# Altium PCB urbanturbine.PcbDoc
Units mil, origin at the board's own origin, x right, y up, seen from the top; angles counter-clockwise.
Board outline 2235 x 2080 mil, 2 copper layers (Top Layer, Bottom Layer); 33 components, 39 nets, 137 pads, 9 vias.
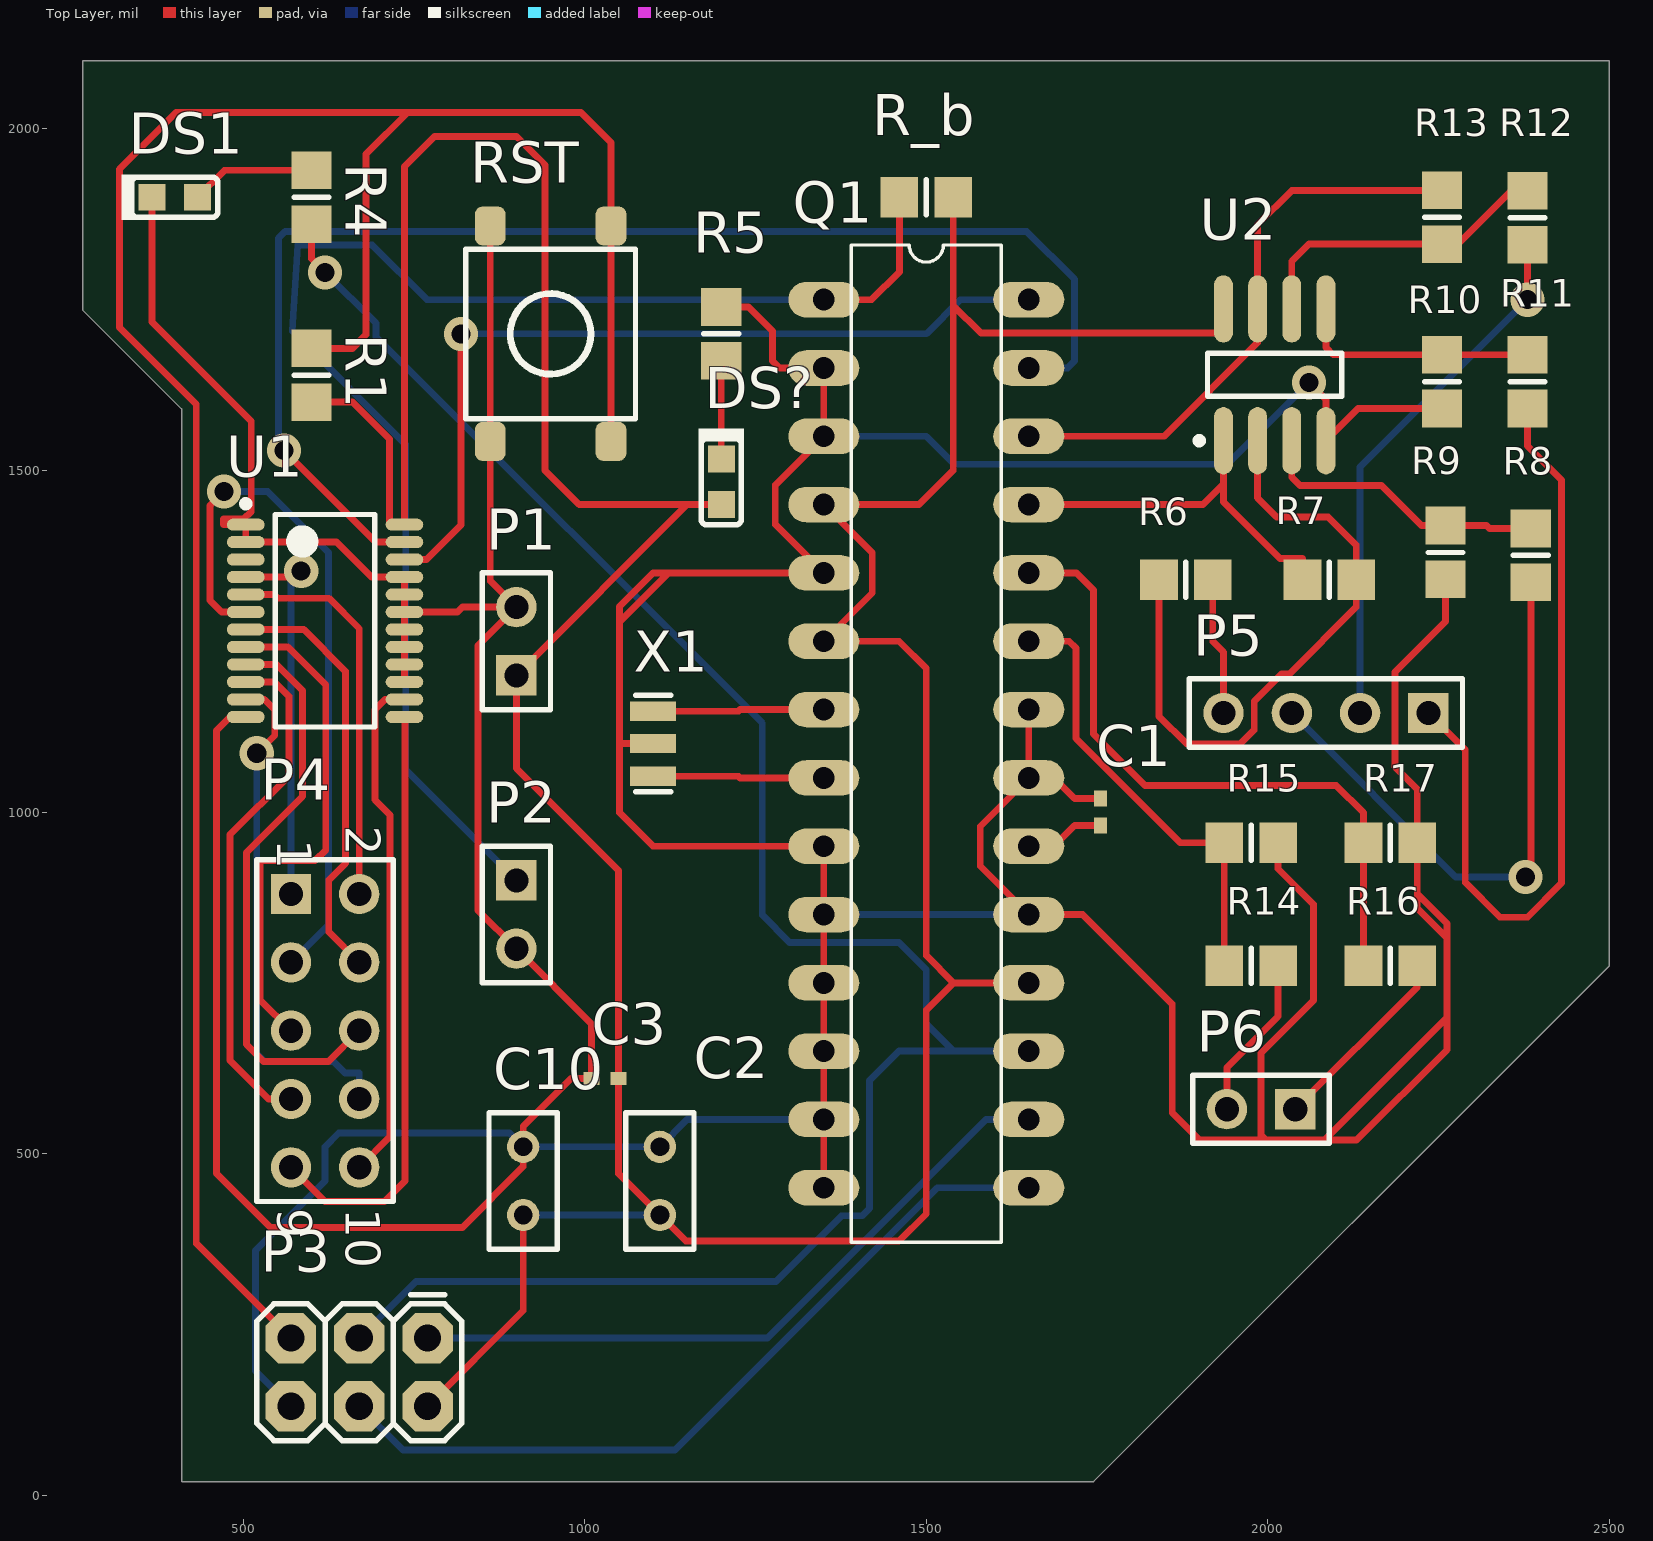
[diagram p0: Top Layer view]
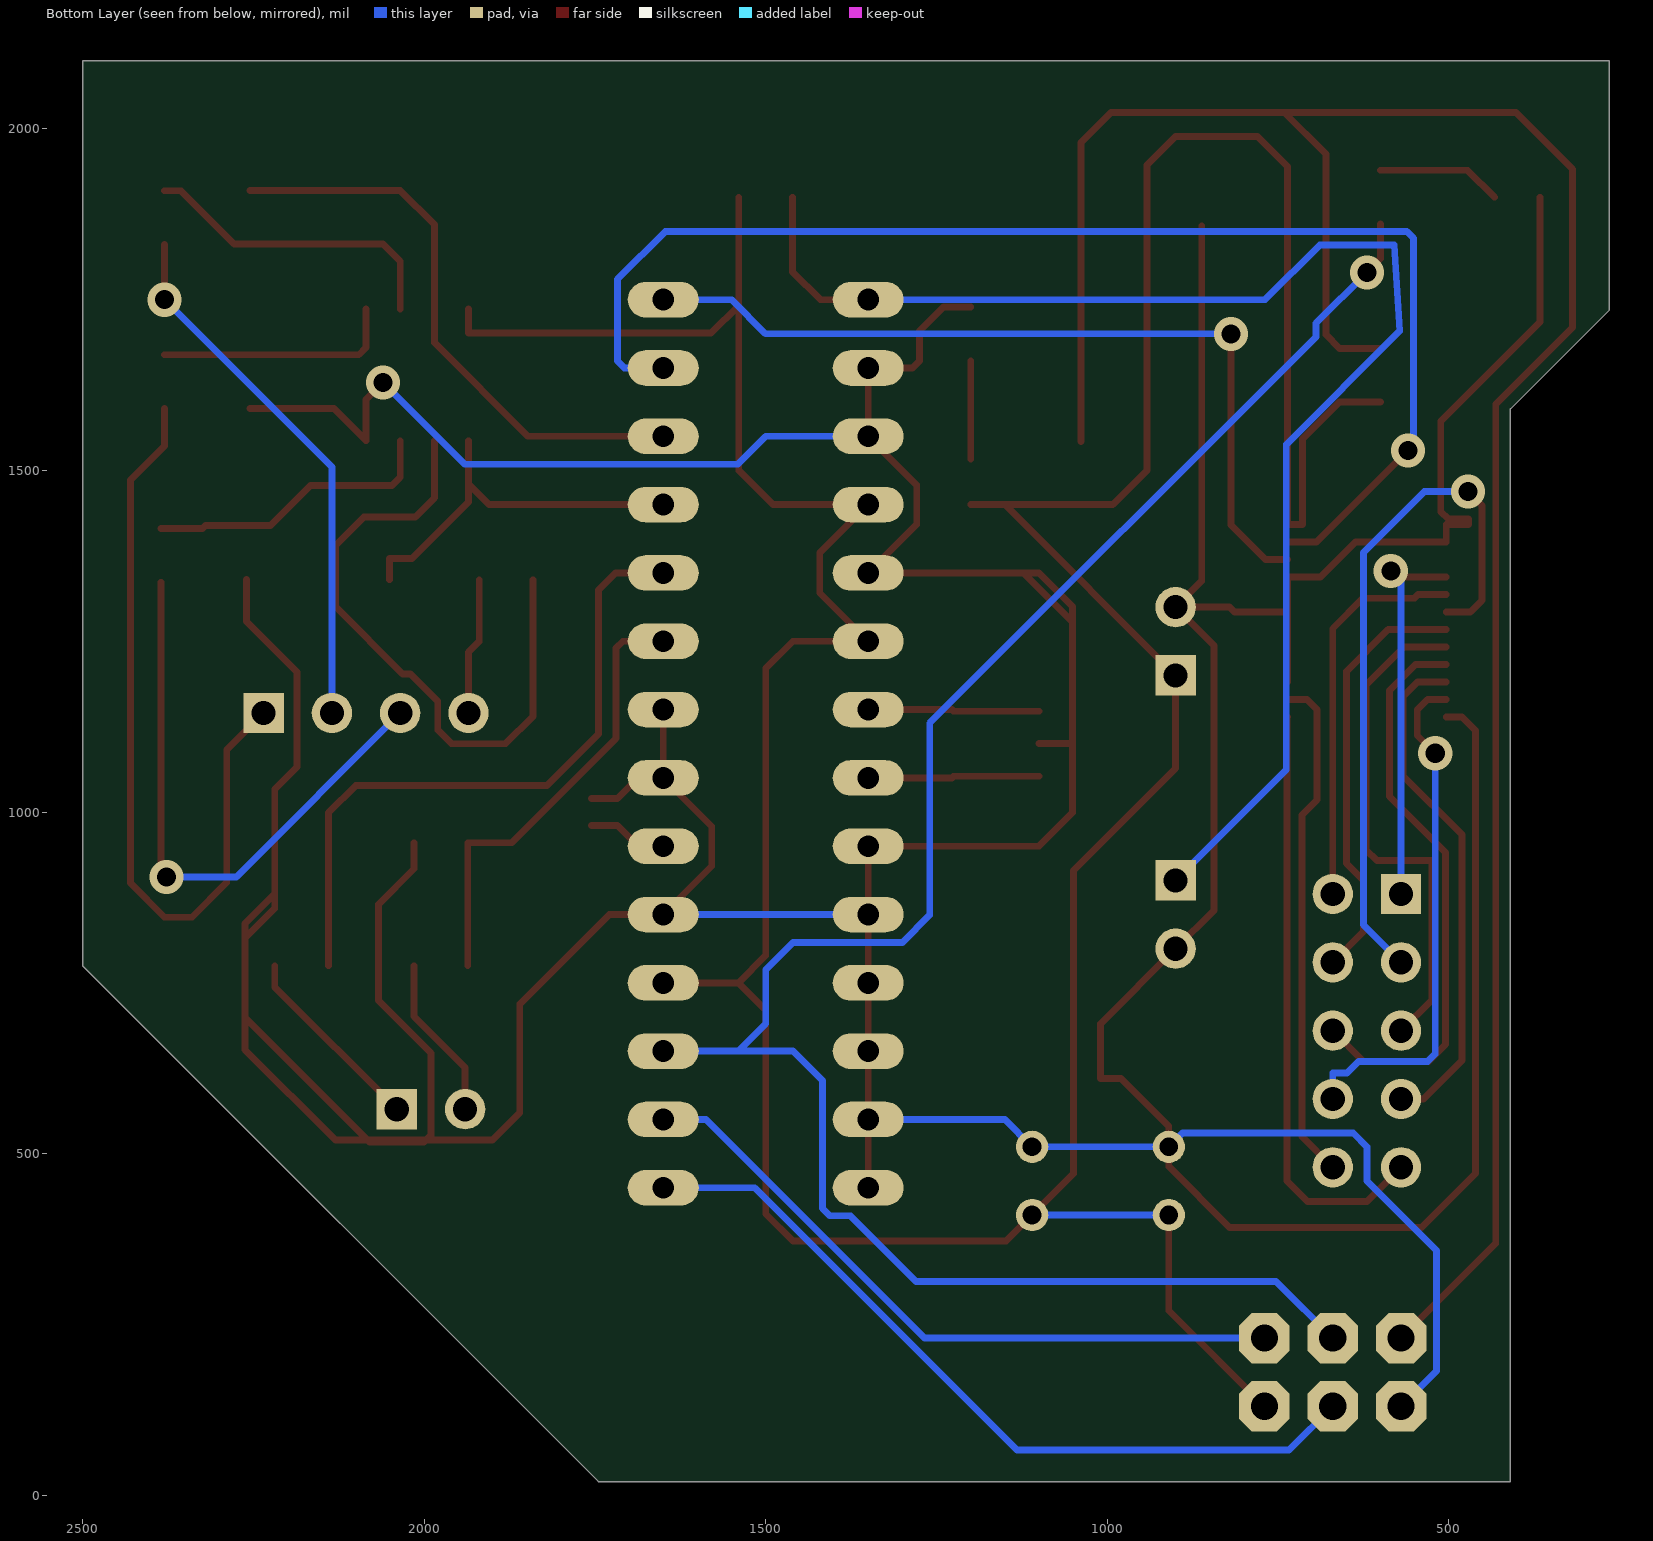
[diagram p1: Bottom Layer view, seen from below]

## Layer stack, top to bottom
Top Solder: solder mask 0.4, Solder Resist, Dk 3.5
Top Layer: signal copper 1.4
Dielectric 1: dielectric 12.6, FR-4, Dk 4.8
Bottom Layer: signal copper 1.4
Bottom Solder: solder mask 0.4, Solder Resist, Dk 3.5

## Board outline
410,1590 265,1735 265,2100 2500,2100 2500,775 1745,20 410,20

## Design rules (kind name [scope] priority, off if disabled: settings)
Clearance [All] p1: gap=10 ignorepadtopadclearanceinfootprint=FALSE except(0: Arc-Hole Track-Hole SMDPad-Hole THPad-Hole Via-Hole Fill-Hole Poly-Hole Region-Hole Text-Hole)
PolygonConnect [All] p1: connectstyle=Relief reliefconductorwidth=10 reliefentries=4 polygonreliefangle="90 Angle" airgapwidth=10
RoutingVias [All] p1: holewidth=28 width=50 viastyle="Through Hole" minholewidth=28 minwidth=50 maxholewidth=28 maxwidth=50
SolderMaskExpansion [All] p1: expansion=4
Width [All] p1: maxlimit=10 minlimit=10 preferedwidth=10
30 further rules are at their usual default settings.

## Classes and differential pairs
component class urbanturbine: C1 C2 C3 C10 DS1 DS? P1 P2 P3 P4 Q1 R1 R4 R5 R_b RST U1 X1
component class sensors: P5 P6 R6 R7 R8 R9 R10 R11 R12 R13 R14 R15 R16 R17 U2

## Components (designator, comment, footprint, x,y, rotation, side; value= is the part's Value field where it differs from the comment)
C1 "C1005X7R1H104K050BB" 0402 1755,1000 r270 top value=0.1uF
C2 "Cap Pol1" RAD-0.1 1110,460 r90 top value=100pF
C3 "C1005X7R1H104K050BB" 0402 1029.68,610 r0 top value=0.1uF
C10 "Cap Pol1" RAD-0.1 910,460 r90 top value=100pF
DS1 "LTST-C191KRKT" KING-LED0603-25-RED_V 400,1900 r0 top
DS? "LTST-C191KGKT" KING-LED0603-25-GREEN_V 1200,1483.46 r270 top
P1 "" HDR1X2 900,1200 r90 top
P2 "" HDR1X2 900,900 r270 top
P3 "M20-9980346" 2X3 770,230 r180 top
P4 "Header 5X2" HDR2X5 570,880 r270 top
P5 "" HDR1X4 2235,1145 r180 top
P6 "" HDR1X2 2040,565 r180 top
Q1 "ATMEGA328P-MU" *DIL28 1500,1100 r0 top
R1 "Res1" 6-0805_M 600,1639.37 r90 top value=1K
R4 "Res1" 6-0805_M 600,1900 r90 top value=1K
R5 "RC0603JR-071KL" 6-0805_M 1200,1700 r90 top value=1k
R6 "10k" 6-0805_M 1880,1340 r0 top value="100k Ohm"
R7 "100k" 6-0805_M 2090,1340 r0 top value="100k Ohm"
R8 "10k" 6-0805_M 2385,1375.63 r270 top value="100k Ohm"
R9 "100k" 6-0805_M 2260,1380 r270 top value="100k Ohm"
R10 "100k" 6-0805_M 2255,1630 r90 top value="100k Ohm"
R11 "10k" 6-0805_M 2380,1630 r270 top value="100k Ohm"
R12 "10k" 6-0805_M 2380,1870 r90 top value="100k Ohm"
R13 "100k" 6-0805_M 2255,1870.63 r90 top value="100k Ohm"
R14 "90k" 6-0805_M 1975.63,775 r0 top value="10k Ohm"
R15 "10k" 6-0805_M 1975.63,955 r180 top value="22k Ohm"
R16 "90k" 6-0805_M 2179.37,775 r0 top value="10k Ohm"
R17 "10k" 6-0805_M 2179.37,955 r180 top value="22k Ohm"
R_b "Res1" 6-0805_M 1500,1900 r180 top value=1K
RST "PTS645SH50SMTR92 LFS" "TACTILE SWITCH SMD" 950,1700 r90 top
U1 "TCA9548A" TCA9548A 620,1280 r0 top
U2 "NCS2333" SO8_M 2010,1640 r90 top
X1 "16MHz" RESONATOR-SMD 1100,1100 r270 top

## Footprints (in the part's own frame and the unit in brackets; to place one, negate y for a bottom-side part, rotate by r counter-clockwise, add the part's x,y. Pads: shape width x height; smd on the part's side, far side on the other; paste and mask are expansions set on the pad)
2X3 [mil] "2X3"
  oct 74x74 hole 40: 1(0,0) 2(0,100) 3(100,0) 4(100,100) 5(200,0) 6(200,100)
  silkscreen extent -50,-63 250,150, body extent -50,-49 250,149, height 335
6-0805_M [mm] "Chip Resistor, Body 2.0x1.2mm, IPC Low Density"
  rect 1.4x1.5 smd: 1(-1,0) 2(1,0)
  silkscreen extent 0,-0.65 0,0.65, body extent -1.07,-0.7 1.07,0.7, height 0.7
0402 [mm] "Chip Capacitor, Body 1.0x0.5mm, IPC High Density"
  rect 0.6x0.5 smd: 1(-0.5,0) 2(0.5,0)
  body extent -0.55,-0.3 0.55,0.3, height 1.3
*DIL28 [mil]
  oval 104x52 hole 32: 1(-150,650) 2(-150,550) 3(-150,450) 4(-150,350) 5(-150,250) 6(-150,150) 7(-150,50) 8(-150,-50) 9(-150,-150) 10(-150,-250) 11(-150,-350) 12(-150,-450) 13(-150,-550) 14(-150,-650) 15(150,-650) 16(150,-550) 17(150,-450) 18(150,-350) 19(150,-250) 20(150,-150) 21(150,-50) 22(150,50) 23(150,150) 24(150,250) 25(150,350) 26(150,450) 27(150,550) 28(150,650)
  silkscreen extent -110,-730 110,730, body extent -315,-730 110,730, height 314
HDR1X2 [mm] "Connector; Header; 2 Position"
  rect 1.5x1.5 hole 0.9: 1(0,0)
  round 1.5 hole 0.9: 2(2.54,0)
  silkscreen extent -1.27,-1.27 3.81,1.27
HDR1X4 [mm] "Connector; Header; 4 Position"
  rect 1.5x1.5 hole 0.9: 1(0,0)
  round 1.5 hole 0.9: 2(2.54,0) 3(5.08,0) 4(7.62,0)
  silkscreen extent -1.27,-1.27 8.89,1.27
HDR2X5 [mm] "Connector; Header; 5x2 Position"
  rect 1.5x1.5 hole 0.9: 1(0,0)
  round 1.5 hole 0.9: 2(0,2.54) 3(2.54,0) 4(2.54,2.54) 5(5.08,0) 6(5.08,2.54) 7(7.62,0) 8(7.62,2.54) 9(10.16,0) 10(10.16,2.54)
  silkscreen extent -1.27,-1.27 11.43,3.81
KING-LED0603-25-GREEN_V [mm] "LED, SMT, Body 1.6 x 0.8 mm, 0.25mm Thickness"
  rect 1x1 smd paste+0 mask+0: 1(0.85,0) 2(-0.85,0)
  silkscreen extent -1.97,-0.85 1.6,0.85, body extent -0.8,-0.4 0.8,0.4, height 0.25
KING-LED0603-25-RED_V [mm] "LED, SMT, Body 1.6 x 0.8 mm, 0.25mm Thickness"
  rect 1x1 smd paste+0 mask+0: 1(0.85,0) 2(-0.85,0)
  silkscreen extent -1.97,-0.85 1.6,0.85, body extent -0.8,-0.4 0.8,0.4, height 0.25
RAD-0.1 [mm] "Radial Cap, Thru-Hole; 2 Leads; 0.1 in Pin Spacing"
  round 1.2 hole 0.7: 1(-1.27,0) 2(1.27,0)
  silkscreen extent -2.54,-1.27 2.54,1.27
RESONATOR-SMD [mil] "RESONATOR-SMD"
  rect 28x67 smd: 1(-47.62,0) 2(-0.38,0) 3(47.62,0)
  silkscreen extent -71,-26 71,26
SO8_M [mm] "SOIC, 8-Leads, Body 4.9x3.9mm, Pitch 1.27mm, IPC Low Density"
  oval 2.5x0.7 smd: 1(-2.45,1.905) 2(-2.45,0.635) 3(-2.45,-0.635) 4(-2.45,-1.905) 5(2.45,-1.905) 6(2.45,-0.635) 7(2.45,0.635) 8(2.45,1.905)
  silkscreen extent -2.57,-2.5 0.8,2.93, body extent -2,-2.5 2,2.5, height 1.75
"TACTILE SWITCH SMD" [mil] "Switch, Through-Hole, 4 Leads, Body 8.5x8.5mm, Row Spacing 9.0mm, Pitch 4.5mm"
  rrect50% 57x45 smd: 1(157.87,-88.58) 2(-157.48,-88.58) 3(157.87,88.19) 4(-157.48,88.19)
  silkscreen extent -124,-124 124,124, body extent -177,-122 177,122, height 177
TCA9548A [mm] "TSOP, 24-Leads, Body 7.80x4.40mm, Pitch 0.65mm, IPC Medium Density"
  oval 1.4x0.45 smd: 1(-2.95,3.575) 2(-2.95,2.925) 3(-2.95,2.275) 4(-2.95,1.625) 5(-2.95,0.975) 6(-2.95,0.325) 7(-2.95,-0.325) 8(-2.95,-0.975) 9(-2.95,-1.625) 10(-2.95,-2.275) 11(-2.95,-2.925) 12(-2.95,-3.575) 13(2.95,-3.575) 14(2.95,-2.925) 15(2.95,-2.275) 16(2.95,-1.625) 17(2.95,-0.975) 18(2.95,-0.325) 19(2.95,0.325) 20(2.95,0.975) 21(2.95,1.625) 22(2.95,2.275) 23(2.95,2.925) 24(2.95,3.575)
  silkscreen extent -3.07,-3.95 1.85,4.47, body extent -3.27,-3.96 3.28,3.93, height 1.2

## Part data
C1 C3: "CAP CER 0.1UF 50V 10% X7R 0402", Capacitance=0.1µF, Manufacturer="TDK Corporation", Operating Temperature="-55°C ~ 125°C", Package / Case="0402 (1005 Metric)", Ratings=-, Supplier Part Number 1=445-5932-1-ND, Temperature Coefficient=X7R, Tolerance=±10%, Voltage - Rated=50V, Applications="General Purpose", Category=Capacitors, ComponentLink1Description=http://product.tdk.com/en/catalog/datasheets/mlcc_commercial_general_en.pdf, ComponentLink1URL=http://product.tdk.com/en/catalog/datasheets/mlcc_commercial_general_en.pdf, Features=-, Height - Seated (Max)=-, Lead Spacing=-, Lead Style=-, Manufacturer Part Number=C1005X7R1H104K050BB, Mounting Type="Surface Mount, MLCC", Packaging="Cut Tape (CT)", Pricing 1="1=0.21, 10=0.14, 100=0.0664, 250=0.05592, 500=0.04684, 1000=0.03845, 5000=0.03251 (CAD)", RoHS="RoHS Compliant", Size / Dimension="0.039\" L x 0.020\" W (1.00mm x 0.50mm)", Stock 1=7100869, Supplier 1=Digi-Key, Thickness (Max)="0.022\" (0.55mm)"
C2 C10: "Polarized Capacitor (Radial)", LatestRevisionDate=17-Jul-2002, LatestRevisionNote="Re-released for DXP Platform.", PackageDescription="Polarized Capacitor (Radial); 2 Leads", PackageReference=RB7.6-15, Published=8-Jun-2000, Publisher="Altium Limited"
DS1: "LED SUPER RED CLR THIN 0603 SMD", Color=Red, Current - Test=20mA, Lens Color=Colorless, Manufacturer="Lite-On Inc.", Millicandela Rating=54mcd, Package / Case="0603 (1608 Metric)", Supplier Part Number 1=160-1447-1-ND, Voltage - Forward (Vf) (Typ)=2V, Category=Optoelectronics, ComponentLink1Description=http://optoelectronics.liteon.com/upload/download/DS22-2000-223/S_110_LTST-C191KRKT.pdf, ComponentLink1URL=http://optoelectronics.liteon.com/upload/download/DS22-2000-223/S_110_LTST-C191KRKT.pdf, Height (Max)=0.55mm, Lens Style/Size="Rectangle with Flat Top, 1.10mm x 0.80mm", Lens Transparency=Clear, Manufacturer Part Number=LTST-C191KRKT, Mounting Type="Surface Mount", Packaging="Cut Tape (CT)", Pricing 1="1=0.42, 10=0.333, 100=0.1812, 250=0.1208, 500=0.10268, 1000=0.07853, 2500=0.07098 (CAD)", RoHS="RoHS Compliant", Size / Dimension="1.60mm L x 0.80mm W", Stock 1=239192, Supplier 1=Digi-Key, Viewing Angle=130°, Wavelength - Dominant=631nm, Wavelength - Peak=639nm
DS?: "LED GREEN CLEAR THIN 0603 SMD", Color=Green, Current - Test=20mA, Lens Color=Colorless, Manufacturer="Lite-On Inc.", Millicandela Rating=35mcd, Package / Case="0603 (1608 Metric)", Supplier Part Number 1=160-1446-6-ND, Voltage - Forward (Vf) (Typ)=2V, Category=Optoelectronics, ComponentLink1Description=http://optoelectronics.liteon.com/upload/download/DS22-2000-228/S_110_LTST-C191KGKT.pdf, ComponentLink1URL=http://optoelectronics.liteon.com/upload/download/DS22-2000-228/S_110_LTST-C191KGKT.pdf, Height (Max)=0.55mm, Lens Style/Size="Rectangle with Flat Top, 1.10mm x 0.80mm", Lens Transparency=Clear, Manufacturer Part Number=LTST-C191KGKT, Mounting Type="Surface Mount", Packaging=Digi-Reel®, Pricing 1="1=0.42, 10=0.333, 100=0.1812, 250=0.1208, 500=0.10268, 1000=0.07853, 2500=0.07098 (CAD)", RoHS="RoHS Compliant", Size / Dimension="1.60mm L x 0.80mm W", Stock 1=186242, Supplier 1=Digi-Key, Viewing Angle=130°, Wavelength - Dominant=571nm, Wavelength - Peak=574nm
P1 P2 P6: library part "Header 2", "Header, 2-Pin", LatestRevisionDate=17-Jul-2002, LatestRevisionNote="Re-released for DXP Platform.", Publisher="Altium Limited"
P3: "DIL VERTICAL PC TAIL PIN HEADER", Color=Black, Manufacturer="Harwin Inc.", Supplier Part Number 1=952-2121-ND, Category="Connectors, Interconnects", ComponentLink1Description=http://cdn.harwin.com/pdfs/M20-998.pdf, ComponentLink1URL=http://cdn.harwin.com/pdfs/M20-998.pdf, Connector Type="Header, Unshrouded, Breakaway", Contact Finish=Tin, Contact Finish Thickness=-, Contact Mating Length="0.240\" (6.10mm)", Contact Type="Male Pin", Fastening Type=-, Features=-, Manufacturer Part Number=M20-9980346, Mounting Type="Through Hole", Number of Positions=6, Number of Positions Loaded=All, Number of Rows=2, Packaging=Bulk, Pitch="0.100\" (2.54mm)", Pricing 1="1=0.32, 10=0.299, 25=0.2552, 50=0.2232, 100=0.2072, 250=0.18336, 500=0.17534, 1000=0.14346, 2500=0.13151 (CAD)", RoHS="RoHS Compliant", Row Spacing="0.100\" (2.54mm)", Stock 1=14297, Supplier 1=Digi-Key, Termination=Solder
P4: "Header, 5-Pin, Dual row", LatestRevisionDate=17-Jul-2002, LatestRevisionNote="Re-released for DXP Platform.", Publisher="Altium Limited"
P5: library part "Header 4", "Header, 4-Pin", LatestRevisionDate=17-Jul-2002, LatestRevisionNote="Re-released for DXP Platform.", Publisher="Altium Limited"
Q1: "IC MCU 8BIT 32KB FLASH 32QFN", Manufacturer=Atmel, Operating Temperature="-40°C ~ 85°C", Package / Case="32-VFQFN Exposed Pad", Supplier Device Package="32-VQFN (5x5)", Supplier Part Number 1=ATMEGA328P-MU-ND, Voltage - Supply (Vcc/Vdd)="1.8 V ~ 5.5 V", Category="Integrated Circuits (ICs)", ComponentLink1Description=http://www.atmel.com/images/atmel-8271-8-bit-avr-microcontroller-atmega48a-48pa-88a-88pa-168a-168pa-328-328p_datasheet_summary.pdf, ComponentLink1URL=http://www.atmel.com/images/atmel-8271-8-bit-avr-microcontroller-atmega48a-48pa-88a-88pa-168a-168pa-328-328p_datasheet_summary.pdf, Connectivity="I²C, SPI, UART/USART", Core Processor=AVR, Core Size=8-Bit, Data Converters="A/D 8x10b", EEPROM Size="1K x 8", Manufacturer Part Number=ATMEGA328P-MU, Number of I/O=23, Oscillator Type=Internal, Packaging=Tray, Peripherals="Brown-out Detect/Reset, POR, PWM, WDT", Pricing 1="1=5.01, 10=4.465, 100=3.6608, 250=3.30364, 500=2.96432, 1000=2.50003 (CAD)", Program Memory Size="32KB (16K x 16)", Program Memory Type=FLASH, RAM Size="2K x 8", RoHS="RoHS Compliant", Speed=20MHz, Stock 1=70195, Supplier 1=Digi-Key
R1 R4 R_b: "Resistor", LatestRevisionDate=17-Jul-2002, LatestRevisionNote="Re-released for DXP Platform.", PackageDescription="Axial Device, Thru-Hole; 2 Leads; 0.3 in Pin Spacing", PackageReference=AXIAL-0.3, Published=8-Jun-2000, Publisher="Altium Limited"
R5: "RES SMD 1K OHM 5% 1/10W 0603", Manufacturer=Yageo, Operating Temperature="-55°C ~ 155°C", Package / Case="0603 (1608 Metric)", Power (Watts)="0.1W, 1/10W", Resistance (Ohms)=1k, Supplier Device Package=0603, Supplier Part Number 1=311-1.0KGRCT-ND, Temperature Coefficient=±100ppm/°C, Tolerance=±5%, Category=Resistors, ComponentLink1Description=http://www.yageo.com/NewPortal/yageodocoutput?fileName=/pdf/R-Chip/PYu-RC_Group_51_RoHS_L_3.pdf, ComponentLink1URL=http://www.yageo.com/NewPortal/yageodocoutput?fileName=/pdf/R-Chip/PYu-RC_Group_51_RoHS_L_3.pdf, Composition="Thick Film", Features="Moisture Resistant", Height="0.022\" (0.55mm)", Manufacturer Part Number=RC0603JR-071KL, Number of Terminations=2, Packaging="Cut Tape (CT)", Pricing 1="1=0.15, 10=0.016, 25=0.012, 100=0.0066, 250=0.005, 500=0.00402, 1000=0.00295, 2500=0.00256 (CAD)", RoHS="RoHS Compliant", Size / Dimension="0.063\" L x 0.031\" W (1.60mm x 0.80mm)", Stock 1=1746734, Supplier 1=Digi-Key
R6 R7 R8 R9 R10 R11 R12 R13: library part 100k-125mW-0805-1%, "Resistor, 100k, 125mW Power Rating, 0805 Package", ManufacturerReference=MCR10EZPF1003, PowerRating=125mWatt, Category=Resistor, DistributorName=Digikey, DistributorReference=RHM100KCRCT-ND, InventoryNumber=RES052, Other=1%, PackageReference=0805
R14 R16: library part 10k-125mW-0805-1%, "Resistor, 10k, 125mW Power Rating, 0805 Package", ManufacturerReference=MCR10EZPF1002, PowerRating=125mWatt, Category=Resistor, DistributorName=Digikey, DistributorReference=RHM10.0KCRCT-ND, InventoryNumber=RES038, Other=1%, PackageReference=0805
R15 R17: library part 22k-125mW-0805-1%, "Resistor, 22k, 125mW Power Rating, 0805 Package", ManufacturerReference=RMCF0805FT22K0, PowerRating=125mWatt, Category=Resistor, DistributorName=Digikey, DistributorReference=RMCF0805FT22K0CT-ND, InventoryNumber=RES044, Other=1%, PackageReference=0805
RST: "SWITCH TACTILE SPST-NO 0.05A 12V", Contact Rating @ Voltage="0.05A @ 12VDC", Illumination Type, Color=-, Manufacturer="C&K Components", Operating Force=200gf, Operating Temperature="-20°C ~ 60°C", Supplier Part Number 1=CKN9085CT-ND, Actuator Height off PCB, from Pins=5.00mm, Actuator Material="Polyamide (PA66), Nylon 6/6", Actuator Orientation="Top Actuated", Actuator Type=Standard, Category=Switches, Circuit=SPST-NO, ComponentLink1Description=http://www.ck-components.com/14409/pts645_25apr13.pdf/, ComponentLink1URL=http://www.ck-components.com/14409/pts645_25apr13.pdf/, Features=-, Illumination=Non-Illuminated, Illumination Voltage (Nominal)=-, Ingress Protection=-, Manufacturer Part Number="PTS645SH50SMTR92 LFS", Mechanical Life="100,000 Cycles", Mounting Type="Surface Mount", Outline="6.00mm x 6.00mm", Packaging="Cut Tape (CT)", Pricing 1="1=0.43, 10=0.418, 25=0.404, 50=0.3892, 100=0.3675, 250=0.34592, 500=0.3315 (CAD)", RoHS="RoHS Compliant", Stock 1=49163, Supplier 1=Digi-Key, Switch Function=Off-Mom, Switch Travel=-, Termination Style="Gull Wing"
U1: "IIC multiplexor"
U2: "IC dual op-amp"
X1: library part CSTNE16M0VH3C000R0, "CER RESONATOR 16MHZ SMD", Capacitance=33pF, Frequency=10MHz, Frequency Stability=±0.2%, Frequency Tolerance=±0.5%, Manufacturer="Murata Electronics North America", Manufacturer Part Number=CSTCE10M0G55Z-R0, Operating Temperature="-40°C ~ 125°C", Package / Case="3-SMD, Non-Standard", Supplier Part Number 1=490-4715-1-ND, Category="Crystals and Oscillators", ComponentLink1Description=http://www.murata.com/~/media/webrenewal/support/library/catalog/products/timingdevice/ceralock/p16e.ashx, ComponentLink1URL=http://www.murata.com/~/media/webrenewal/support/library/catalog/products/timingdevice/ceralock/p16e.ashx, Features="Built in Capacitor", Height="0.031\" (0.80mm)", Impedance=-, Mounting Type="Surface Mount", Packaging="Cut Tape (CT)", Pricing 1="1=0.69, 10=0.573, 50=0.5166, 100=0.4596, 500=0.43548, 1000=0.36763 (CAD)", RoHS="RoHS Compliant", Size / Dimension="0.126\" L x 0.051\" W (3.20mm x 1.30mm)", Stock 1=14995, Supplier 1=Digi-Key, Type=Ceramic

## Via types
v1: diameter 50, hole 28, Top Layer to Bottom Layer, 9 vias

## Nets (pads, with @x,y where several pads share a name; then routed paths per layer and width w, separated by ;. In a path a pad name is that pad's centre, name@x,y a point inside that pad or via, vN(x,y) a via of type N, cw(c..) or ccw(c..) an arc to the next point about the centre after c; other vN are vias at no path point)
+5: C2.1 C3.2 C10.1 DS?.1 P1.1 P3.2 Q1.4 Q1.6 Q1.18 R1.1 R_b.1 U1.24 U2.8 | length 6390.6
  Top Layer w10: R1.1 660,1600 714.18,1545.82 714.18,1420.75 U1.24@736,1420.75 ; U1.24 U1.24@736,1420.75 ; P3.2 910,270 C10.1 ; DS?.1 1150,1450 ; R_b.1 1539.37,1741.63 ; Q1.18 1540,750 ; U2.8 1935,1701 1580,1701 1539.37,1741.63 ; U1.24@736,1420.75 736,1945 780,1989 900,1989 942,1947 942,1500 992,1450 1150,1450 ; 1150,1450 P1.1 900,1064 1049.37,914.63 C3.2 1049.37,470.63 C2.1 1148,372 1460,372 1500,412 1500,710 1540,750 ; 1539.37,1741.63 1539.37,1500 1489.37,1450 Q1.4 1421,1379 1421,1321 Q1.6 1460,1250 1500,1210 1500,790 1540,750
  Bottom Layer w10: C10.1 C2.1
BTN_+: P2.1 Q1.1 R_b.2 | length 2106.1
  Top Layer w10: Q1.1 1420,1750 1460.63,1790.63 R_b.2
  Bottom Layer w10: P2.1 738,1062 738,1538 572,1704 580,1830 689,1830 769,1750 Q1.1
CRANK_CURRENT: Q1.25 R7.1 U2.1 | length 568
  Top Layer w10: Q1.25 1905,1450 1935,1480 ; U2.1 1935,1480 ; R7.1 2050.63,1371 2018,1371 1935,1454 1935,1480
CRANK_IN_+: P6.2 R14.2 | length 241.1
  Top Layer w10: P6.2 1940,626 2015,701 R14.2
CRANK_SHUNT_+: P5.3 R8.2 | length 876
  Top Layer w10: v1(2377,905) 2385,913 R8.2
  Bottom Layer w10: P5.3 2275,905 v1(2377,905)
CRANK_SHUNT_-: P5.4 R6.2 | length 201.5
  Top Layer w10: R6.2 1919.37,1249.63 1935,1234 P5.4
CRANK_VOLTAGE: Q1.23 R14.1 R15.2 | length 665.8
  Top Layer w10: Q1.23 1709,1250 1719,1240 1719,1108 1872,955 R15.2 R14.1
GND: C1.1 C2.2 C3.1 C10.2 DS1.2 P1.2 P2.2 P3.6 Q1.2 Q1.3 Q1.5 Q1.9 Q1.10 Q1.11 Q1.12 Q1.13 Q1.14 Q1.19 Q1.21 Q1.22 R5.2 R9.2 R10.1 R15.1 R17.1 RST.3 RST.4 U1.1 U1.2 U1.12 U1.15 U1.16 U1.17 U1.18 U1.19 U1.20 U1.21 U2.4 X1.2 | length 11738.1
  Top Layer w10: DS1.2 366.53,1717.47 512,1572 512,1440 500.83,1428.83 471.5,1428.83 471.5,1420.75 U1.1 U1.2 636.82,1395.16 688,1343.98 U1.21 U1.20 U1.19 ; U1.12 481,1139.25 461,1119.25 461,471 540,392 821,392 910,481 C10.2 910,540 980,610 C3.1 1010,690 P2.2 844,856 844,1244 P1.2 ; U1.15 U1.16 U1.17 U1.18 U1.19 ; RST.3 RST.4 861.81,1338.19 P1.2 ; X1.2 1051,1100.38 ; R5.2 1240,1739.37 1275,1704.37 1275,1660 1285,1650 Q1.2 Q1.3 1279,1479 1279,1421 Q1.5 1123,1350 ; Q1.14 Q1.13 Q1.12 Q1.11 Q1.10 Q1.9 1100,950 1051,999 1051,1100.38 ; Q1.22 Q1.21 ; C1.1 1717.31,1019.69 1687,1050 Q1.21 ; R15.1 2015,917 2067,865 2067,724 1990,647 1990,527 1997,520 ; v1(2060,1629) 2085,1604 U2.4 2132.09,1590.63 R10.1 ; R9.2 2260,1279 2186,1205 2186,1065.74 2218.74,1033 R17.1 2218.74,880.26 ; U1.19 814,1292.8 821.2,1300 P1.2 ; 1051,1100.38 1051,1278 ; 1051,1278 1051,1301 1100,1350 1123,1350 ; 1051,1278 1123,1350 ; Q1.21 1579,979 1579,921 Q1.19 1729,850 1860,719 1860,560 1900,520 1997,520 ; 1997,520 2000,517 2080,517 2083,520 ; 1997,520 2083,520 ; 2083,520 2262,699 ; 2083,520 2130,520 2262,652 2262,699 ; 2218.74,880.26 2218.74,859 2262,815.74 ; 2218.74,880.26 2262,837 2262,815.74 ; 2262,699 2262,815.74
  Bottom Layer w10: P3.6 518,182 518,358 620,460 620,510 640,530 890,530 C10.2 C2.2 1150,550 Q1.13 ; Q1.10 Q1.19 ; Q1.3 1500,1550 1541,1509 1940,1509 v1(2060,1629)
MISO: P3.1 Q1.16 | length 1012.5
  Bottom Layer w10: P3.1 1267.49,230 1587.49,550 Q1.16
MOSI: P3.4 Q1.15 | length 1165.6
  Bottom Layer w10: P3.4 734,66 1132,66 1516,450 Q1.15
MUX_RST: U1.3
NetC1_2: C1.2 Q1.20 | length 117.6
  Top Layer w10: Q1.20 1687,950 1717.31,980.31 C1.2
NetDS1_1: DS1.1 R4.2 | length 182.8
  Top Layer w10: DS1.1 472.83,1939.37 R4.2
NetDS?_2: DS?.2 R5.1 | length 143.7
  Top Layer w10: DS?.2 R5.1
NetQ1_7: Q1.7 X1.1 | length 251
  Top Layer w10: X1.1 1225,1147.62 1227.38,1150 Q1.7
NetQ1_8: Q1.8 X1.3 | length 251
  Top Layer w10: X1.3 1225,1052.38 1227.38,1050 Q1.8
NetR6_1: R6.1 R7.2 U2.2 | length 960.2
  Top Layer w10: R6.1 1840.63,1140 1880.63,1100 1960,1100 1980,1120 1980,1162 2020,1202 2031.37,1202 2129.37,1300 R7.2 2129.37,1391 2088.37,1432 2013,1432 1985,1460 U2.2
NetR8_1: R8.1 R9.1 U2.3 | length 434.6
  Top Layer w10: U2.3 2035,1490 2047,1478 2166.37,1478 2225,1419.37 R9.1 2320,1419.37 2324.37,1415 R8.1
NetR10_2: R10.2 R11.1 U2.5 | length 355.9
  Top Layer w10: U2.5 2085,1680 2095.63,1669.37 R10.2 R11.1
NetR12_2: R12.2 R13.1 U2.6 | length 457.5
  Top Layer w10: U2.6 2035,1806.26 2060,1831.26 R13.1 2278,1831.26 2356.11,1909.37 R12.2
RST: P3.5 R1.2 RST.1 RST.2 | length 3463.4
  Top Layer w10: P3.5 431.5,368.5 431.5,1596.79 319,1709.29 319,1941 402,2024 741,2024 ; R1.2 660,1678.74 680,1698.74 680,1963 741,2024 ; RST.2 1038.58,1700 RST.1 1038.58,1980 994.58,2024 741,2024
SC0: P4.2 U1.5 | length 575.2
  Top Layer w10: U1.5 545,1318.39 550.39,1313 625.39,1313 670,1268.39 P4.2
SC1: P4.4 U1.7 | length 626.1
  Top Layer w10: U1.7 588.8,1267.2 650,1206 650,925 625.47,900.47 625.47,824.53 P4.4
SC2: P4.6 U1.9 | length 844.7
  Top Layer w10: U1.9 548.7,1216.02 587,1177.72 587,1023 505,941 505,660 530,635 625,635 P4.6
SC3: P4.8 U1.11 | length 762.9
  Top Layer w10: U1.11 531,1164.84 546.42,1149.42 546.42,1112.42 v1(520,1086)
  Bottom Layer w10: v1(520,1086) 520,646 531,635 632,635 649,618 670,618 P4.8
SC4: P4.10 U1.14 | length 747
  Top Layer w10: P4.10 715,525 715,995.91 693,1017.91 693,1150 707.84,1164.84 U1.14
SCK: P3.3 Q1.17 R4.1 | length 2957.2
  Top Layer w10: R4.1 600,1810 v1(620,1790)
  Bottom Layer w10: v1(620,1790) 694.49,1715.51 694.49,1695.51 1260,1130 1260,849 1300,809 1460,809 1500,769 1500,690 1540,650 ; P3.3 753,313 1280,313 1376,409 1406,409 1417,420 1417,607 1460,650 1540,650 ; Q1.17 1540,650
SCL: Q1.28 U1.22 | length 1235.5
  Top Layer w10: U1.22 768.57,1369.57 819,1420 v1(819,1700)
  Bottom Layer w10: v1(819,1700) 1500,1700 1550,1750 Q1.28
SD0: P4.1 U1.4 | length 564.1
  Top Layer w10: U1.4 575.98,1343.98 v1(585,1353)
  Bottom Layer w10: P4.1 570,1338 v1(585,1353)
SD1: P4.3 U1.6 | length 1039.6
  Top Layer w10: v1(472,1469) 451.5,1448.5 451.5,1310 468.7,1292.8 U1.6
  Bottom Layer w10: v1(472,1469) 536,1469 625,1380 625,835 P4.3
SD2: P4.5 U1.8 | length 751.7
  Top Layer w10: U1.8 565.39,1241.61 621,1186 621,944.53 605.47,929 525,929 525,725 P4.5
SD3: P4.7 U1.10 | length 753
  Top Layer w10: U1.10 546,1190.43 567,1169.43 567,1053 481,967 481,636.19 537.19,580 P4.7
SD4: P4.9 U1.13 | length 880.2
  Top Layer w10: P4.9 620,430 707,430 737,460 737,1139.25 U1.13
SDA: Q1.27 U1.23 | length 1935.7
  Top Layer w10: v1(560,1529.16) 694,1395.16 U1.23
  Bottom Layer w10: v1(560,1529.16) 551.58,1537.57 551.58,1840 561.58,1850 1647,1850 1717,1780 1717,1660 1707,1650 Q1.27
TURBINE_CURRENT: Q1.26 R13.2 U2.7 | length 855.5
  Top Layer w10: Q1.26 1848,1550 1985,1687 U2.7 1985,1860 2035,1910 R13.2
TURBINE_IN_+: P6.1 R16.2 | length 284
  Top Layer w10: P6.1 2218.74,743.74 R16.2
TURBINE_SHUNT_+: P5.1 R11.2 | length 1168.5
  Top Layer w10: P5.1 2289,1091 2289,897 2340,846 2380,846 2430,896 2430,1486 2380,1536 R11.2
TURBINE_SHUNT_-: P5.2 R12.1 | length 787.1
  Top Layer w10: v1(2380,1750) R12.1
  Bottom Layer w10: P5.2 2135,1505 v1(2380,1750)
TURBINE_VOLTAGE: Q1.24 R16.1 R17.2 | length 983
  Top Layer w10: Q1.24 1720,1350 1745,1325 1745,1114 1820,1039 2100,1039 2140,999 R17.2 R16.1

## Silkscreen, mask and mechanical layers (free items; w line width, h text height)
Mechanical 1:
  the board outline again, w10

## Text inside footprints (layer, text, board x,y; h text height)
P4: Top Overlay "10" at 650,420 h50 r270; Top Overlay "9" at 550,420 h50 r270; Top Overlay "1" at 550,960 h50 r270; Top Overlay "2" at 650,980 h50 r270